# Altium PCB NG6011.PcbDoc
Units mm, origin at the board's own origin, x right, y up, seen from the top; angles counter-clockwise.
Board outline 26 x 11.5 mm, 4 copper layers (Top Layer, Internal Layer 1, Internal Layer 2, Bottom Layer), stack 0.772 mm thick; 15 components, 10 nets, 53 pads, 67 vias.
Unrouted connection lines stored in the file: 4.
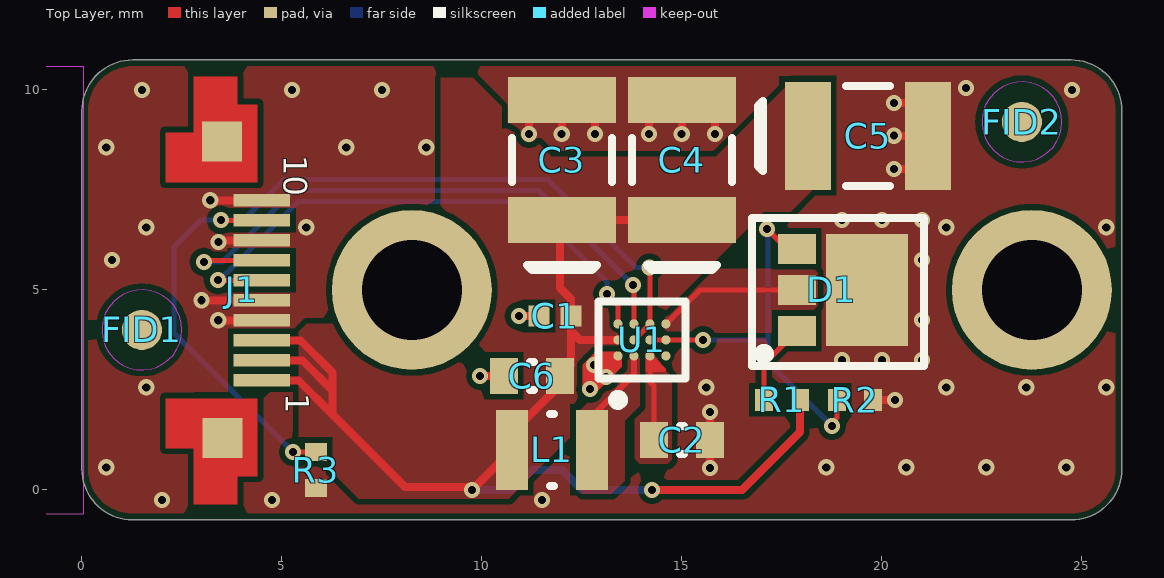
[diagram p0: Top Layer view]
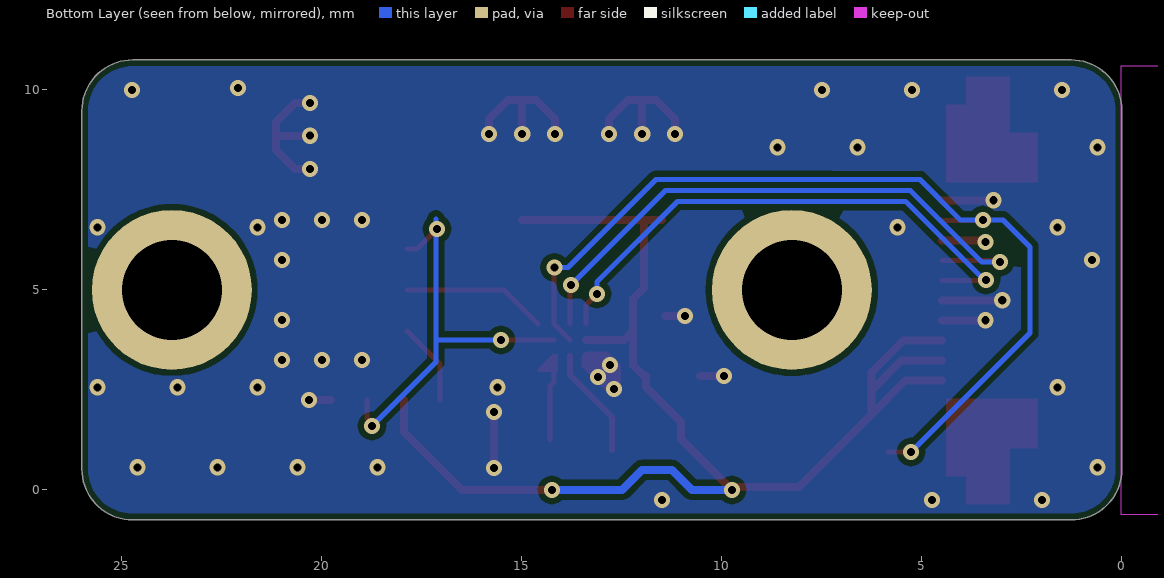
[diagram p1: Bottom Layer view, seen from below]
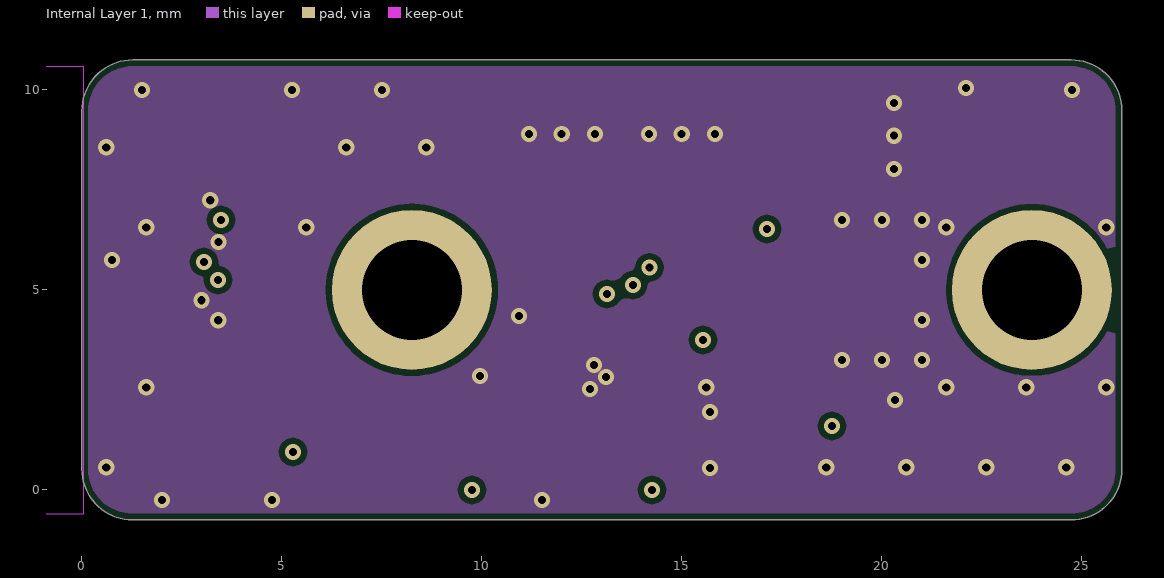
[diagram p2: Internal Layer 1]
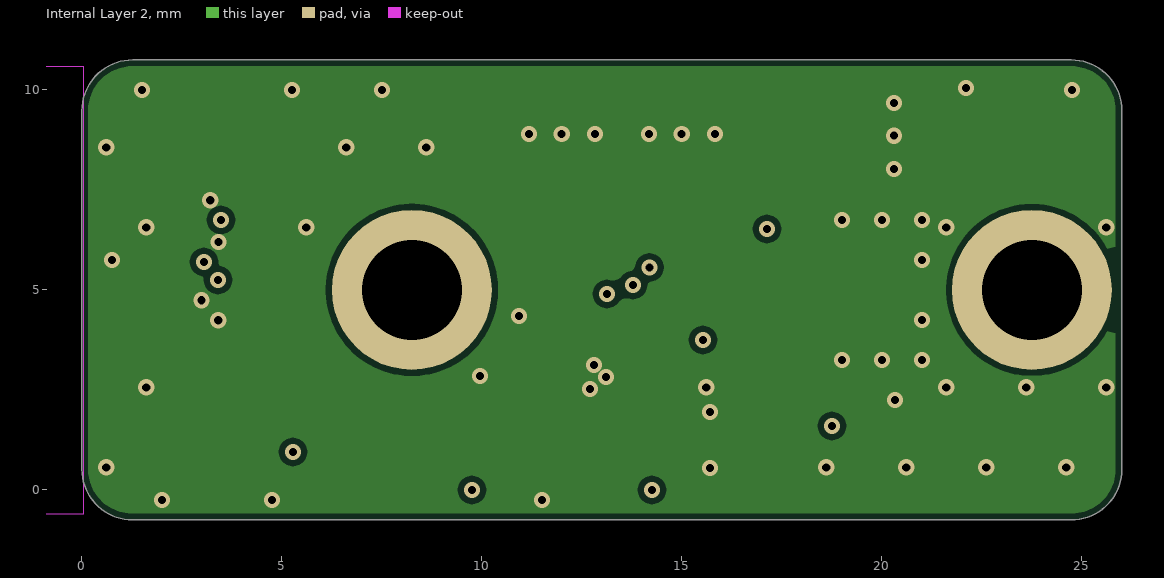
[diagram p3: Internal Layer 2]

## Layer stack, top to bottom
Top Solder Mask: solder mask 0.0178, Solder Resist, Dk 3.5
Top Layer: signal copper 0.0356
Dielectric 1: prepreg 0.0711, PP-006, Dk 4
Internal Layer 1: signal copper 0.0279
Dielectric 2: core 0.51, Core-038, Dk 4.3
Internal Layer 2: signal copper 0.0203
Dielectric 3: prepreg 0.0711, PP-006, Dk 4
Bottom Layer: signal copper 0.0356
Bottom Solder Mask: solder mask 0.0178, Solder Resist, Dk 3.5

## Board outline
0,0.52 ccw(c1.27,0.52) 1.27,-0.75 24.73,-0.75 ccw(c24.73,0.52) 26,0.52 26,9.48 ccw(c24.73,9.48) 24.73,10.75 1.27,10.75 ccw(c1.27,9.48) 0,9.48

## Design rules (kind name [scope] priority, off if disabled: settings)
AcuteAngle [All] p1: minimum=1.50000000000000E+0001 checktracksonly=TRUE
AssemblyTestPointUsage [All] p1: valid=2
BoardOutlineClearance [not InNet('GND')] p1: gap=0.2 ignorepadtopadclearanceinfootprint=FALSE
BoardOutlineClearance BoardOutlineClearance_GND [All] p2: gap=0.15 ignorepadtopadclearanceinfootprint=FALSE
Clearance Clearance_foot [HasFootprint('LM3644YFFR')] p1: gap=0.1 ignorepadtopadclearanceinfootprint=FALSE
Clearance [All] p2: gap=0.15 ignorepadtopadclearanceinfootprint=FALSE
ComponentClearance "BGA Decoupling Clearance" [IsComponent AND OnBottomLayer AND WithinRoom('BGA Decoupling') vs IsComponent AND OnBottomLayer AND WithinRoom('BGA Decoupling')] p1: gap=0 collisioncheckmode=3 verticalgap=0 showdistances=FALSE
ComponentClearance [All] p2: gap=0 collisioncheckmode=3 verticalgap=0 showdistances=TRUE
ComponentOrientations [All] p1: allowedrotations=32
FabricationTestPointUsage [All] p1: valid=2 allowmultiple=FALSE
HoleSize [All] p1: absolutevalues=TRUE maxlimit=25.4 minlimit=0.102 maxpercent=80.000 minpercent=20.000
HoleToHoleClearance [All] p1: gap=0.076 allowstackedmicrovias=TRUE
MinimumAnnularRing [All] p1: minimumring=0.076
MinimumSolderMaskSliver [All] p1: minsoldermaskwidth=0.01
NetAntennae [All] p1: netantennaetolerance=0.025
PlaneConnect [All] p1: pad.planeconnectstyle=Relief pad.reliefexpansion=0.508 pad.reliefentries=4 pad.reliefconductorwidth=0.254 pad.reliefairgap=0.254 via.planeconnectstyle=Direct via.reliefexpansion=0.508 via.reliefentries=4 via.reliefconductorwidth=0.254 via.reliefairgap=0.254
PolygonConnect [All] p1: connectstyle=Direct reliefconductorwidth=0.254 reliefentries=4 polygonreliefangle="90 Angle" airgapwidth=0.254
RoutingPriority [InNet('No Net')] p1: routingpriority=0
RoutingVias [All] p1: holewidth=0.203 width=0.406 viastyle="Through Hole" minholewidth=0.203 minwidth=0.406 maxholewidth=0.203 maxwidth=0.406
SMDToCorner [All] p1: distance=0
SMDToPlane [All] p1: distance=0
SilkToSilkClearance [All] p1: silktosilkclearance=-0.254
SilkToSolderMaskClearance [IsPad] p1: minsilkscreentomaskgap=-5 clearancetoexposedcopper=TRUE
SolderMaskExpansion SolderMaskExpansion_Via [IsVia] p1: expansion=-10 istentingtop=TRUE
SolderMaskExpansion [All] p2: expansion=0.051 istentingtop=FALSE
UnRoutedNet [All] p1: checkbadconnections=TRUE
Width [All] p1: maxlimit=0.5 minlimit=0.125 preferedwidth=0.2
18 further rules are at their usual default settings.

## Classes and differential pairs
component class NG6011_IR_Dot_Projector: C1 C2 C3 C4 C5 C6 D1 J1 L1 R1 R2 R3 U1
component class TopLevel: FID1 FID2

## Components (designator, comment, footprint, x,y, rotation, side; value= is the part's Value field where it differs from the comment)
C1 "10uF 0402" CAPC0402(1005)70_L 11.825,4.35 r0 top
C2 "10uF 0603" CAPC0603(1608)100_L 15,1.25 r0 top
C3 "150uF 1206 10V tantal" RESTL1210(3225)_N 12,8.25 r90 top
C4 "150uF 1206 10V tantal" RESTL1210(3225)_N 15,8.25 r90 top
C5 "150uF 1206 10V tantal" RESTL1210(3225)_N 19.65,8.85 r0 top
C6 "10uF 0603" CAPC0603(1608)100_L 11.25,2.85 r0 top
D1 "BELAGO1.1" Belago1.1 19.25,5 r180 top
FID1 "FIDUCIAL_ROUND_1MM" FIDUCIAL_ROUND_1MM 1.5,4 r90 top
FID2 "FIDUCIAL_ROUND_1MM" FIDUCIAL_ROUND_1MM 23.5,9.2 r90 top
J1 "SFV10R-2STE1HLF Top Contact" SFV10R-2STE1HLF 4,5 r90 top
L1 "1uH, 3.2A, 20%" DFE252012P-1R0M=P2 11.75,1 r0 top
R1 "300K 0402" RESC0402(1005)_L 17.5,2.25 r0 top
R2 "360K 0402" RESC0402(1005)_L 19.325,2.25 r180 top
R3 "10K 0402" RESC0402(1005)_L 5.85,0.5 r90 top
U1 "LM3644YFFR" LM3644YFFR 14,3.75 r90 top

## Footprints (in the part's own frame and the unit in brackets; to place one, negate y for a bottom-side part, rotate by r counter-clockwise, add the part's x,y. Pads: shape width x height; smd on the part's side, far side on the other; paste and mask are expansions set on the pad)
Belago1.1 [mm] "SOT23, 6-Leads, Body 2x1.25mm, Pitch 0.65mm"
  rect 0.95x0.75 smd: 1(1.375,1.025) 2(1.375,0) 3(1.375,-1.025)
  rect 2.05x2.8 smd: 4(-0.375,0)
  silkscreen extent -1.8,-1.8 2.5,1.9, body extent -1.8,-1.8 2.4,1.8, height 3.25
CAPC0402(1005)70_L [mm] "Chip Capacitor, Body 1.0x0.5mm, Height 0.7mm, IPC High Density"
  rect 0.52x0.52 smd: 1(-0.4,0) 2(0.4,0)
  body extent -0.55,-0.3 0.55,0.3, height 0.7
CAPC0603(1608)100_L [mm] "Chip Capacitor, Body 1.6x0.8mm, Height 1.0mm, IPC High Density"
  rect 0.7x0.9 smd: 1(-0.7,0) 2(0.7,0)
  silkscreen extent -0.05,-0.35 0.05,0.35, body extent -0.87,-0.47 0.88,0.48, height 1
DFE252012P-1R0M=P2 [mm] "Chip Inductor, 2-Leads, Body 2.40x2.00mm, IPC High Density"
  rect 0.8x2 smd: 1(-1,0) 2(1,0)
  silkscreen extent -0.05,-0.9 0.05,0.9, body extent -1.25,-1.1 1.25,1.1, height 1.2
FIDUCIAL_ROUND_1MM [mm] "Round, 1mm dia"
  round 1 smd paste-1 mask+0.5: 1(0,0)
  Top Layer keep-out circle w0.025: c0,0 r1
LM3644YFFR [mm] "DSBGA 12 (pitch 0.4mm)"
  round 0.23 smd paste-1000 mask-1000: A1(-0.4,0.6) A2(0,0.6) A3(0.4,0.6) B1(-0.4,0.2) B2(0,0.2) B3(0.4,0.2) C1(-0.4,-0.2) C2(0,-0.2) C3(0.4,-0.2) D1(-0.4,-0.6) D2(0,-0.6) D3(0.4,-0.6)
  silkscreen extent -1.62,-1.09 0.96,1.09, body extent -1.21,-1.34 1.21,1.34, height 0.25
RESC0402(1005)_L [mm] "Chip Resistor, Body 1.0x0.5mm, IPC High Density"
  rect 0.45x0.55 smd: 1(-0.45,0) 2(0.45,0)
  body extent -0.52,-0.27 0.53,0.28, height 0.4
RESTL1210(3225)_N [mm] "Chip Resistor, Body 3.2x2.5mm, IPC Medium Density"
  rect 1.15x2.7 smd: 1(-1.5,0) 2(1.5,0)
  silkscreen extent -2.75,-1.25 0.55,1.25, body extent -1.7,-1.35 1.7,1.35, height 0.71
SFV10R-2STE1HLF [mm] "CONN FFC TOP 10POS 0.50MM R/A"
  rect 0.305x1.405 smd: 1(-2.258,-0.494) 1(-2.258,-0.494) 2(-1.759,-0.494) 3(-1.258,-0.494) 4(-0.758,-0.494) 5(-0.258,-0.494) 6(0.242,-0.494) 7(0.741,-0.494) 8(1.242,-0.494) 9(1.742,-0.494) 10(2.242,-0.494)
  rect 1x1 smd: 11(-3.707,0.486) 12(3.708,0.494)
  Top Layer region: -3.959,-0.395 -2.709,-0.395 -2.709,1.905 -3.959,1.905
  Top Layer region: -5.358,0.105 -2.708,0.105 -2.708,1.205 -5.358,1.205
  Top Layer region: -4.658,-0.395 -2.708,-0.395 -2.708,1.205 -4.658,1.205
  Top Layer region: 4.642,1.205 2.692,1.205 2.692,-0.395 4.642,-0.395
  Top Layer region: 5.342,1.205 2.692,1.205 2.692,0.105 5.342,0.105
  Top Layer region: 3.942,1.905 2.692,1.905 2.692,-0.395 3.942,-0.395
  Keep-Out Layer region: 5.594,5.708 5.594,3.973 -5.611,3.973 -5.611,5.708
  body extent -5.26,-0.89 5.24,4.01, height 1.82

## Part data
C1: library part GRM155R60J106ME15D, "CAP CER 10UF 6.3V X5R 0402 20%", Capacitance=10uF, Case Code (Imperial)=0402, Case Code (Metric)=1005, Dielectric=X5R, Manufacturer 1=Murata, Max Operating Temperature=85°C, Min Operating Temperature=-55°C, Supplier Part Number 1=490-13238-1-ND, Tolerance=20%, Voltage Rating=6.3V, Case/Package=0402, ComponentLink1Description=https://www.murata.com/~/media/webrenewal/support/library/catalog/products/capacitor/mlcc/c02e.ashx?la=en-us&src-supplier=Digi-Key, ComponentLink1URL=https://www.murata.com/~/media/webrenewal/support/library/catalog/products/capacitor/mlcc/c02e.ashx?la=en-us&src-supplier=Digi-Key, Length=0.039inch, Manufacturer Part Number 1=GRM155R60J106ME15D, Mount="Surface Mount", Packaging="Tape and Reel", Pricing 1="1=0.23000, 10=0.15700, 100=0.07950, 500=0.05442, 1000=0.04814, 2500=0.04605, 5000=0.04186 (USD)", RoHS=Yes, Stock 1=1839627, Supplier 1=Digi-Key, Thickness=0.026inch, Voltage Rating (DC)=6.3V, Width=0.02inch
C2 C6: library part GRM188R61A106ME69D, "CAP CER 10UF 10V X5R 0603 20%", Capacitance=10uF, Case Code (Imperial)=0603, Case Code (Metric)=1608, Dielectric=X5R, Manufacturer 1=Murata, Max Operating Temperature=85°C, Min Operating Temperature=-55°C, Package Quantity=4000, Supplier Part Number 1=490-10475-1-ND, Tolerance=20%, Voltage Rating=10V, Case/Package=0603, ComponentLink1Description=http://www.mouser.com/ds/2/281/c02e-2905.pdf?src-supplier=Mouser, ComponentLink1URL=http://www.mouser.com/ds/2/281/c02e-2905.pdf?src-supplier=Mouser, ComponentLink2Description=http://components.arrow.com/part/dataview/0323_06119472?src-supplier=Arrow+Europe, ComponentLink2URL=http://components.arrow.com/part/dataview/0323_06119472?src-supplier=Arrow+Europe, ComponentLink3Description=http://www.farnell.com/datasheets/2048014.pdf?src-supplier=Farnell, ComponentLink3URL=http://www.farnell.com/datasheets/2048014.pdf?src-supplier=Farnell, ComponentLink4Description=http://www.farnell.com/datasheets/1872210.pdf?src-supplier=Farnell, ComponentLink4URL=http://www.farnell.com/datasheets/1872210.pdf?src-supplier=Farnell, ComponentLink5Description=http://search.murata.co.jp/Ceramy/image/img/A01X/G101/ENG/GRM188R61A106ME69-01.pdf?src-supplier=Digi-Key, ComponentLink5URL=http://search.murata.co.jp/Ceramy/image/img/A01X/G101/ENG/GRM188R61A106ME69-01.pdf?src-supplier=Digi-Key, ComponentLink6Description=http://www.farnell.com/datasheets/1872210.pdf?src-supplier=Newark, ComponentLink6URL=http://www.farnell.com/datasheets/1872210.pdf?src-supplier=Newark, ComponentLink7Description=http://www.farnell.com/datasheets/2048014.pdf?src-supplier=Element14, ComponentLink7URL=http://www.farnell.com/datasheets/2048014.pdf?src-supplier=Element14, ComponentLink8Description=http://www.farnell.com/datasheets/2048014.pdf?src-supplier=Newark, ComponentLink8URL=http://www.farnell.com/datasheets/2048014.pdf?src-supplier=Newark, Depth=0.8mm, Height=0.8mm, Lead Free="Lead Free", Length=1.6mm, Manufacturer Part Number 1=GRM188R61A106ME69D, Material=Ceramic, Mount="Surface Mount", Packaging="Tape and Reel", Pricing 1="1=0.21000, 10=0.14100, 100=0.07130, 500=0.04876, 1000=0.04313 (USD)", REACH SVHC=Unknown, RoHS=Yes, Stock 1=2873098, Supplier 1=Digi-Key, Termination=SMD/SMT, Thickness=0.035inch, Voltage Rating (DC)=10V, Weight=0.000222oz, Width=0.8mm
C3 C4 C5: library part TLJB157M010R0500, "Tantalum Capacitor, Polarized, Tantalum (dry/solid), 10V, 20% +Tol, 20% -Tol, 150uF, Surface Mount, 1210", Capacitance=150uF, Capacitor Type=Tantalum, ESR (Equivalent Series Resistance)=500mR, Leakage Current=15uA, Manufacturer 1="Kyocera AVX", Max Operating Temperature=125°C, Min Operating Temperature=-55°C, Negative Tolerance=20%, Package Shape=Rectangular, Package Style=SMTMeter, Rated DC Voltage (URdc)=10V, Ripple Current=371mA, Supplier Part Number 1=478-3349-1-ND, Category="Tantalum Capacitors", ComponentLink1Description=https://datasheet.ciiva.com:443/pdfs/VipMasterIC/IC/AVXC/AVXC-S-A0008508048/AVXC-S-A0008508048-1.pdf?src-supplier=IHS+Markit, ComponentLink1URL=https://datasheet.ciiva.com:443/pdfs/VipMasterIC/IC/AVXC/AVXC-S-A0008508048/AVXC-S-A0008508048-1.pdf?src-supplier=IHS+Markit, ComponentLink2Description=https://datasheet.ciiva.com/264/tlj-264786.pdf?src-supplier=Digi-Key, ComponentLink2URL=https://datasheet.ciiva.com/264/tlj-264786.pdf?src-supplier=Digi-Key, ComponentLink3Description=https://datasheet.ciiva.com/264/tlj-264787.pdf?src-supplier=Digi-Key, ComponentLink3URL=https://datasheet.ciiva.com/264/tlj-264787.pdf?src-supplier=Digi-Key, ComponentLink4Description=https://datasheet.ciiva.com/264/tlj-264788.pdf?src-supplier=Digi-Key, ComponentLink4URL=https://datasheet.ciiva.com/264/tlj-264788.pdf?src-supplier=Digi-Key, ComponentLink5Description=https://datasheet.ciiva.com/46385/1910903-46385237.pdf?src-supplier=Element14, ComponentLink5URL=https://datasheet.ciiva.com/46385/1910903-46385237.pdf?src-supplier=Element14, ComponentLink6Description=https://datasheet.ciiva.com/28515/tlj-28515528.pdf?src-supplier=Element14, ComponentLink6URL=https://datasheet.ciiva.com/28515/tlj-28515528.pdf?src-supplier=Element14, ComponentLink7Description=https://datasheet.ciiva.com/7773/1533257-7773833.pdf?src-supplier=Element14, ComponentLink7URL=https://datasheet.ciiva.com/7773/1533257-7773833.pdf?src-supplier=Element14, ComponentLink8Description=https://datasheet.ciiva.com/14593/70001364-14593673.pdf?src-supplier=Allied+Electronics, ComponentLink8URL=https://datasheet.ciiva.com/14593/70001364-14593673.pdf?src-supplier=Allied+Electronics, ComponentLink9Description=https://datasheet.ciiva.com/14606/70001364-14606409.pdf?src-supplier=Allied+Electronics, ComponentLink9URL=https://datasheet.ciiva.com/14606/70001364-14606409.pdf?src-supplier=Allied+Electronics, ComponentLink10Description=https://datasheet.ciiva.com/7773/1533257-7773834.pdf?src-supplier=Element14, ComponentLink10URL=https://datasheet.ciiva.com/7773/1533257-7773834.pdf?src-supplier=Element14, ComponentLink11Description=https://datasheet.ciiva.com/11229/tlj-11229389.pdf?src-supplier=Avnet, ComponentLink11URL=https://datasheet.ciiva.com/11229/tlj-11229389.pdf?src-supplier=Avnet, ComponentLink12Description=https://datasheet.ciiva.com/17339/tlj-17339422.pdf?src-supplier=Avnet+Europe, ComponentLink12URL=https://datasheet.ciiva.com/17339/tlj-17339422.pdf?src-supplier=Avnet+Europe, Dielectric Material=Tantalum, Height=1.9mm, JESD-609 Code=e3, Length=3.5mm, Manufacturer Part Number 1=TLJB157M010R0500, Mount="Surface Mount", Number of Pins=2, Packaging="Tape and Reel", Polarity=Polarized, Positive Tolerance=20%, Pricing 1="1=0,74000, 10=0,54700, 50=0,43800, 100=0,37540, 500=0,29716, 1000=0,25024 (USD)", REACH SVHC=Yes, RoHS=Yes, RoHS Compliant=Yes, Size Code=1411, Stock 1=10000, Supplier 1=Digi-Key, Terminal Finish=Nickel, Termination="J BEND", Width=2.8mm
D1: "Dot-Pattern Infrared Illuminator for 3D Stereoscopic / Imaging AQAA-20", Manufacturer 1=AMS, Manufacturer Part Number 1="Belago1.1 AQAA-20"
FID1 FID2: library part FIDUCIAL, "Fiducial with various available footprints"
J1: library part SFV10R-2STE1HLF, "CONN FFC TOP 10POS 0.50MM R/A", Contact Resistance=30mR, Current Rating=500mA, Flammability Rating="UL94 V-0", Housing Color=Black, Insulation Resistance=100MR, Manufacturer 1="Amphenol FCI", Max Operating Temperature=105°C, Max Voltage Rating (AC)=50V, Min Operating Temperature=-55°C, Package Quantity=1, Supplier Part Number 1=609-4306-1-ND, Actuator Material=Glass,Polyphenylene, ComponentLink1Description=https://datasheet.ciiva.com/672/10112793-672039.pdf?src-supplier=Digi-Key, ComponentLink1URL=https://datasheet.ciiva.com/672/10112793-672039.pdf?src-supplier=Digi-Key, ComponentLink2Description=https://datasheet.ciiva.com/672/10112793-672040.pdf?src-supplier=Digi-Key, ComponentLink2URL=https://datasheet.ciiva.com/672/10112793-672040.pdf?src-supplier=Digi-Key, ComponentLink3Description=https://datasheet.ciiva.com/672/10112793-672041.pdf?src-supplier=Digi-Key, ComponentLink3URL=https://datasheet.ciiva.com/672/10112793-672041.pdf?src-supplier=Digi-Key, ComponentLink4Description=https://datasheet.ciiva.com/10368/10112793-10368361.pdf?src-supplier=Avnet, ComponentLink4URL=https://datasheet.ciiva.com/10368/10112793-10368361.pdf?src-supplier=Avnet, Contact Location=Top, Contact Material=Bronze, Contact Plating=Tin, Depth=4.9mm, Gender=Female, Housing Material=Polyamide, Lead Free="Lead Free", Length=10.5mm, Manufacturer Part Number 1=SFV10R-2STE1HLF, Max Voltage Rating (DC)=50V, Mount="Surface Mount", Number of Contacts=10, Number of Positions=10, Number of Rows=1, Orientation="Right Angle", Packaging="Tape and Reel", Pitch=0.5mm, Pricing 1="1=0.63000, 10=0.59300, 25=0.53360, 50=0.47420, 100=0.45440, 250=0.41488, 500=0.39512, 1000=0.32597 (USD)", Radiation Hardening=No, RoHS=Yes, Stock 1=78727, Supplier 1=Digi-Key, Supplier 2=Mouser, Supplier Part Number 2=649-SFV10R-2STE1HLF, Termination=Solder, Voltage Rating=50V, Wire/Cable Type=Straight
L1: library part DFE252012P-1R0M=P2, "FIXED IND 1UH 3.2A 42 MOHM SMD", Case Code (Imperial)=1008, Case Code (Metric)=2520, Current Rating=4.3A, DC Resistance (DCR)=42mR, Inductance=1uH, Manufacturer=Murata, Manufacturer Part Number=DFE252012P-1R0M=P2, Max DC Current=3.2A, Max Operating Temperature=125°C, Min Operating Temperature=-40°C, Supplier Part Number 1=490-10647-1-ND, Test Frequency=1MHz, Tolerance=20%, Case/Package=1008, ComponentLink1Description=http://www.farnell.com/datasheets/2550134.pdf?src-supplier=Farnell, ComponentLink1URL=http://www.farnell.com/datasheets/2550134.pdf?src-supplier=Farnell, ComponentLink2Description=https://www.murata.com/~/media/webrenewal/products/inductor/chip/tokoproducts/wirewoundmetalalloychiptype/m_dfe252012p.ashx?src-supplier=Digi-Key, ComponentLink2URL=https://www.murata.com/~/media/webrenewal/products/inductor/chip/tokoproducts/wirewoundmetalalloychiptype/m_dfe252012p.ashx?src-supplier=Digi-Key, ComponentLink3Description=http://www.murata.com/~/media/webrenewal/products/inductor/chip/tokoproducts/wirewoundmetalalloychiptype/m_dfe252012p.ashx?src-supplier=Digi-Key, ComponentLink3URL=http://www.murata.com/~/media/webrenewal/products/inductor/chip/tokoproducts/wirewoundmetalalloychiptype/m_dfe252012p.ashx?src-supplier=Digi-Key, ComponentLink4Description=http://www.toko.co.jp/products/pdf/inductors/dfe252012p.pdf?src-supplier=Avnet, ComponentLink4URL=http://www.toko.co.jp/products/pdf/inductors/dfe252012p.pdf?src-supplier=Avnet, Composition=Wirewound, Core Material=Ferrite, Depth=2mm, Height - Seated (Max)=0.039inch, Length=0.098inch, Manufacturer 1=Murata, Manufacturer 2=Murata, Manufacturer 3=Murata, Manufacturer 4=Murata, Manufacturer Part Number 1=DFE252012P-1R0M=P2, Manufacturer Part Number 2=DFE252012P-1R0M=P2, Manufacturer Part Number 3=DFE252012P-1R0M=P2, Manufacturer Part Number 4=DFE252012P-1R0M=P2, Mount="Surface Mount", Packaging="Tape and Reel", Pricing 1="1=0.43000, 10=0.37800, 100=0.27030, 500=0.22702, 1000=0.18377 (USD)", Pricing 2="1=0.43000, 10=0.37800, 100=0.27030, 500=0.22702, 1000=0.18377 (USD)", Pricing 3="1=0.43000, 10=0.37900, 50=0.37900, 100=0.27000, 1000=0.18400, 10000=0.14600 (USD)", Pricing 4="1=0.64000, 10=0.56500, 100=0.40500, 500=0.34000, 1000=0.27500 (SGD)", RoHS=Yes, Shielding=Shielded, Stock 1=2560, Stock 2=95, Stock 3=667, Stock 4=41, Supplier 1=Digi-Key, Supplier 2=Digi-Key, Supplier 3=Mouser, Supplier 4=Element14, Supplier Part Number 2=490-10647-6-ND, Supplier Part Number 3=81-DFE252012P-1R0MP2, Supplier Part Number 4=2530071, Width=0.079inch
R1: library part RC0402FR-07300KL, "RES SMD 300K OHM 1% 1/16W 0402", Case Code (Imperial)=0402, Case Code (Metric)=1005, Manufacturer 1=Yageo, Max Operating Temperature=155°C, Min Operating Temperature=-55°C, Power Rating=63mW, Resistance=300kR, Supplier Part Number 1=311-300KLRCT-ND, Temperature Coefficient=100ppm/°C, Tolerance=1%, Voltage Rating=50V, Case/Package=0402, ComponentLink1Description=https://datasheet.ciiva.com/16771/pyu-rc0402-51-rohs-l-6-r-16771583.pdf?src-supplier=Future+Electronics, ComponentLink1URL=https://datasheet.ciiva.com/16771/pyu-rc0402-51-rohs-l-6-r-16771583.pdf?src-supplier=Future+Electronics, Composition="Thick Film", Depth=0.5mm, Height=0.35mm, Lead Free="Lead Free", Length=1mm, Manufacturer Part Number 1=RC0402FR-07300KL, Military Standard=Not, Packaging="Tape and Reel", Pricing 1="1=0.10000, 10=0.01600, 100=0.00640, 1000=0.00289, 2500=0.00251, 5000=0.00207 (USD)", REACH SVHC=Unknown, RoHS=Yes, Stock 1=860842, Supplier 1=Digi-Key, Supplier 2=Newark, Supplier 3=Mouser, Supplier Part Number 2=59M5009, Supplier Part Number 3=603-RC0402FR-07300KL, Termination=SMD/SMT, Voltage Rating (DC)=50V, Width=0.5mm
R2: library part RC0402FR-07360KL, "Fixed Resistor, Metal Glaze/thick Film, 0.0625W, 360000ohm, 50V, 1% +/-Tol, 100ppm/Cel, Surface Mount, 0402", Manufacturer 1=Yageo, Max Operating Temperature=155°C, Min Operating Temperature=-55°C, Package Height=0.35mm, Package Length=1mm, Package Shape=Rectangular, Package Style=SMTMeter, Package Width=0.5mm, Rated Power Dissipation (P)=62.5mW, Rated Temperature=70°C, Resistance=360kR, Resistor Type="FIXED RESISTOR", Supplier Part Number 1=311-360KLRCT-ND, Temperature Coefficient=100ppm/°C, Tolerance=1%, Working Voltage=50V, Additional Feature="LASER TRIMMABLE", Category="Chip SMD Resistors", ComponentLink1Description=https://datasheet.ciiva.com:443/pdfs/VipMasterIC/IC/YAGO/YAGO-S-A0008145938/YAGO-S-A0008145938-1.pdf?src-supplier=IHS+Markit, ComponentLink1URL=https://datasheet.ciiva.com:443/pdfs/VipMasterIC/IC/YAGO/YAGO-S-A0008145938/YAGO-S-A0008145938-1.pdf?src-supplier=IHS+Markit, ComponentLink2Description=https://datasheet.ciiva.com/2453/pyu-r-int-thick-7-2453619.pdf?src-supplier=Digi-Key, ComponentLink2URL=https://datasheet.ciiva.com/2453/pyu-r-int-thick-7-2453619.pdf?src-supplier=Digi-Key, ComponentLink3Description=https://datasheet.ciiva.com/2453/pyu-r-int-thick-7-2453620.pdf?src-supplier=Digi-Key, ComponentLink3URL=https://datasheet.ciiva.com/2453/pyu-r-int-thick-7-2453620.pdf?src-supplier=Digi-Key, ComponentLink4Description=https://datasheet.ciiva.com/2453/pyu-r-int-thick-7-2453621.pdf?src-supplier=Digi-Key, ComponentLink4URL=https://datasheet.ciiva.com/2453/pyu-r-int-thick-7-2453621.pdf?src-supplier=Digi-Key, ComponentLink5Description=https://datasheet.ciiva.com/16742/pyu-rc0402-51-rohs-l-6-r-16742217.pdf?src-supplier=Future+Electronics, ComponentLink5URL=https://datasheet.ciiva.com/16742/pyu-rc0402-51-rohs-l-6-r-16742217.pdf?src-supplier=Future+Electronics, ComponentLink6Description=https://datasheet.ciiva.com/8886/pyu-rc0402-51-rohs-l-6-8886029.pdf?src-supplier=Avnet, ComponentLink6URL=https://datasheet.ciiva.com/8886/pyu-rc0402-51-rohs-l-6-8886029.pdf?src-supplier=Avnet, ComponentLink7Description=https://datasheet.ciiva.com/12561/pyu-rc0402-51-rohs-l-6-r-8721-12561150.pdf?src-supplier=Mouser, ComponentLink7URL=https://datasheet.ciiva.com/12561/pyu-rc0402-51-rohs-l-6-r-8721-12561150.pdf?src-supplier=Mouser, Construction=Chip, JESD-609 Code=e3, Manufacturer Part Number 1=RC0402FR-07360KL, Mount="Surface Mount", Number of Pins=2, Packaging="Tape and Reel", Pricing 1="1=0,10000, 10=0,01600, 100=0,00660, 1000=0,00299, 2500=0,00259, 5000=0,00214 (USD)", REACH SVHC=Yes, RoHS=Yes, RoHS Compliant=Yes, Size Code=0402, Stock 1=68700, Supplier 1=Digi-Key, Technology="METAL GLAZE/THICK FILM", Terminal Finish=Nickel, Termination=Wraparound
R3: library part RC0402FR-1310KL, "RES SMD 10K OHM 1% 0402 1/16W Chip Resistor, 0402 [1005 Metric], 10 kohm, RC Series, 50 V, Thick Film, 62.5 mW", Case Code (Imperial)=0402, Case Code (Metric)=1005, Manufacturer 1=Yageo, Max Operating Temperature=155°C, Min Operating Temperature=-55°C, Power Rating=62.5mW, Resistance=10kR, Supplier Part Number 1=67R9960, Temperature Coefficient=100ppm/°C, Tolerance=1%, Voltage Rating=50V, Case/Package=0402, ComponentLink1Description=https://datasheet.ciiva.com/16940/pyu-rc0402-51-rohs-l-6-16940293.pdf?src-supplier=Avnet+Europe, ComponentLink1URL=https://datasheet.ciiva.com/16940/pyu-rc0402-51-rohs-l-6-16940293.pdf?src-supplier=Avnet+Europe, ComponentLink2Description=https://datasheet.ciiva.com/28386/pyu-rc0402-51-rohs-l-6-28386855.pdf?src-supplier=Avnet+Europe, ComponentLink2URL=https://datasheet.ciiva.com/28386/pyu-rc0402-51-rohs-l-6-28386855.pdf?src-supplier=Avnet+Europe, ComponentLink3Description=https://datasheet.ciiva.com/16740/pyu-rc0402-51-rohs-l-6-r-16740602.pdf?src-supplier=Future+Electronics, ComponentLink3URL=https://datasheet.ciiva.com/16740/pyu-rc0402-51-rohs-l-6-r-16740602.pdf?src-supplier=Future+Electronics, ComponentLink4Description=https://datasheet.ciiva.com/8891/pyu-rc0402-51-rohs-l-6-8891339.pdf?src-supplier=Avnet, ComponentLink4URL=https://datasheet.ciiva.com/8891/pyu-rc0402-51-rohs-l-6-8891339.pdf?src-supplier=Avnet, ComponentLink5Description=https://datasheet.ciiva.com/5557/pyu-rc0402-51-rohs-l-6-r-5557997.pdf?src-supplier=Mouser, ComponentLink5URL=https://datasheet.ciiva.com/5557/pyu-rc0402-51-rohs-l-6-r-5557997.pdf?src-supplier=Mouser, ComponentLink6Description=https://datasheet.ciiva.com/7983/1018594-7983533.pdf?src-supplier=Element14, ComponentLink6URL=https://datasheet.ciiva.com/7983/1018594-7983533.pdf?src-supplier=Element14, Composition="Thick Film", Contact Plating=Tin,Matte,Lead, Depth=0.5mm, Lead Free="Lead Free", Length=1mm, Manufacturer Part Number 1=RC0402FR-1310KL, Military Standard=Not, Number of Pins=2, Number of Terminations=2, Packaging="Tape and Reel", Pricing 1="1=0.10000, 25=0.01200, 100=0.00400, 250=0.00400, 500=0.00300, 1000=0.00300 (USD)", Radiation Hardening=No, REACH SVHC="No SVHC", RoHS=Yes, Stock 1=62239, Supplier 1=Newark, Supplier 2="Future Electronics", Supplier 3=Mouser, Supplier 4=Element14, Supplier Part Number 2=RC0402FR-1310KL-CUTT, Supplier Part Number 3=603-RC0402FR-1310KL, Supplier Part Number 4=1799235, Termination=SMD/SMT, Voltage Rating (DC)=50V, Working Voltage=50V
U1: library part LM3644, "LED Driver, 2-Segment, PBGA12", Manufacturer 1="Texas Instruments", Max Operating Temperature=85°C, Max Supply Voltage=5.5V, Min Operating Temperature=-40°C, Min Supply Voltage=2.5V, Package Body Material=Plastic, Package Code=VFBGA, Package Shape=Rectangular, Package Style="GRID ARRAY, VERY THIN PROFILE, FINE PITCHMeter", Peak Reflow Temperature (Cel)=260°C, Supply Voltage-Nom=3.6V, Temperature Grade=INDUSTRIAL, Category="LED Drivers", ComponentLink1Description=https://www.ti.com:443/lit/ds/symlink/lm3644.pdf?src-supplier=IHS+Markit, ComponentLink1URL=https://www.ti.com:443/lit/ds/symlink/lm3644.pdf?src-supplier=IHS+Markit, ComponentLink2Description=https://datasheet.ciiva.com/48475/lm3644-48475318.pdf?src-supplier=Avnet, ComponentLink2URL=https://datasheet.ciiva.com/48475/lm3644-48475318.pdf?src-supplier=Avnet, Data Input Mode=SERIAL, Height - Seated (Max)=0.625mm, Interface IC Type="LED DISPLAY DRIVER", JESD-609 Code=e1, Length=1.66mm, Manufacturer Part Number 1=LM3644YFFR, Moisture Sensitivity Level=1, Multiplexed Display Capability=No, Number of Functions=1, Number of Pins=12, Number of Segments=2, Pricing 1="1=0,64580, 10=0,63600, 25=0,62590, 100=0,61590, 250=0,60610, 500=0,59600, 1000=0,58600, 3000=0,35000, 30000=0,34520, 300000=0,31610, 1500000=0,29870, 3000000=0,29850 (USD)", REACH SVHC=Yes, RoHS=Yes, RoHS Compliant=Yes, Stock 1=2033, Supplier 1="Arrow Electronics", Supplier Part Number 1=LM3644YFFR, Surface Mount=Yes, Terminal Finish=Copper, Terminal Form=Ball, Terminal Pitch=0.4mm, Terminal Position=BOTTOM, Width=1.28mm

## Free pads (board coordinates)
  round 4 hole 2.5 paste-10 mask+0.05: 5(23.75,5) 6(8.25,5)

## Via types
v1: diameter 0.406, hole 0.203, Top Layer to Bottom Layer, tented both sides, 67 vias

## Nets (pads, with @x,y where several pads share a name; then routed paths per layer and width w, separated by ;. In a path a pad name is that pad's centre, name@x,y a point inside that pad or via, vN(x,y) a via of type N, cw(c..) or ccw(c..) an arc to the next point about the centre after c; other vN are vias at no path point)
5V: C1.2 C3.1 C4.1 C5.1 C6.2 J1.1 J1.2 J1.3 L1.1 R1.2 U1.A2 | length 34.2
  Top Layer w0.2: J1.1@4.494,2.742 5.408,2.742 6.262,1.887 ; J1.2 5.509,3.241 6.262,2.488 ; J1.3 5.458,3.742 6.262,2.937 6.262,2.488 ; v1@9.75,0.075 8.075,0.075 6.262,1.887 ; v1@9.825,0.075 L1.1 11.025,1.275 11.025,1.7 11.9,2.575 C6.2@11.9,2.85 ; C3.1@11.5,6.75 C3.1 ; C6.2 12.225,3.125 12.225,3.975 ; U1.A2 12.45,3.75 12.225,3.975 ; v1(14.25,0) 16.5,0 17.95,1.45 R1.2 ; C4.1 C3.1 ; 6.262,1.887 6.262,2.488 ; C3.1 11.95,6.7 11.95,5.05 12.225,4.775 C1.2 12.225,3.975
  Bottom Layer w0.2: v1(9.75,0) 10.75,0 11.25,0.5 12,0.5 12.5,0 v1(14.25,0)
GND: C1.1 C2.2 C3.2 C4.2 C5.2 C6.1 D1.4 J1.4 J1.5 J1.8 J1.10 R2.1 R3.1 U1.A1 | length 21.3
  Top Layer w0.2: v1(2.992,4.742) J1.5 ; v1(3.209,7.242) J1.10 ; v1(3.408,4.242) J1.4 ; v1@3.411,6.214 v1(3.411,6.198) 3.451,6.237 3.597,6.237 3.601,6.242 J1.8 ; v1(9.95,2.85) C6.1 ; v1(10.925,4.35) C1.1 ; v1(11.175,8.9) 11.175,9.275 11.65,9.75 C3.2 ; v1@12.006,8.894 12.006,8.9 12,8.906 C3.2 ; v1(12.7,2.525) 12.72,2.525 12.981,2.786 13.005,2.786 13.05,2.831 13.05,2.875 13.094,2.875 13.203,2.984 13.203,3.028 13.4,3.225 U1.A1 13.025,3.35 v1(12.8,3.125) ; v1(12.825,8.9) 12.825,9.275 12.35,9.75 C3.2 ; v1(13.1,2.825) 13.4,3.125 ; v1(14.175,8.9) 14.175,9.275 14.65,9.75 C4.2 ; v1@15.006,8.894 15.006,8.9 15,8.906 C4.2 ; v1(15.7,0.55) C2.2 v1(15.7,1.95) ; v1(15.825,8.9) 15.825,9.275 15.35,9.75 C4.2 ; R2.1 v1(20.325,2.25) ; v1@20.294,8.844 20.3,8.844 20.306,8.85 C5.2 ; v1(20.3,8.025) 20.675,8.025 21.15,8.5 C5.2 ; v1(20.3,9.675) 20.675,9.675 21.15,9.2 C5.2
  other v1: 2,-0.25 4.75,-0.25 11.5,-0.25 0.608,0.565 18.608,0.565 20.608,0.565 22.608,0.565 24.608,0.565 1.608,2.565 15.608,2.565 21.608,2.565 23.608,2.565 25.608,2.565 19,3.25 20,3.25 21,3.25 21,4.25 0.75,5.75 21,5.75 1.608,6.565 5.608,6.565 21.608,6.565 25.608,6.565 19,6.75 20,6.75 21,6.75 0.608,8.565 6.608,8.565 8.608,8.565 20.3,8.856 11.994,8.9 14.994,8.9 1.5,10 5.25,10 7.5,10 24.75,10 22.1,10.05
HWEN: D1.3 R2.2 U1.C2 U1.D2 | length 10.4
  Top Layer w0.125: U1.C2 U1.D2 v1(15.525,3.75) ; v1(17.125,6.525) 17.625,6.025 D1.3 ; v1(18.75,1.6) 18.75,1.676 18.875,1.801 R2.2
  Bottom Layer w0.125: v1(15.525,3.75) 17.15,3.75 ; 17.15,6.775 17.15,3.75 ; v1(18.75,1.6) 17.15,3.2 17.15,3.75
I2C_SCL: J1.7 U1.B3 | length 14.9
  Top Layer w0.125: v1(3.05,5.7) 3.092,5.741 J1.7 ; v1(13.775,5.125) 13.8,5.1 U1.B3
  Bottom Layer w0.125: v1(3.05,5.7) 3.506,5.7 5.291,7.484 7.386,7.484 7.389,7.488 11.412,7.488 v1(13.775,5.125)
I2C_SDA: J1.6 U1.A3 | length 13.6
  Top Layer w0.125: v1(3.4,5.25) 3.408,5.242 J1.6 ; v1(13.125,4.9) 13.4,4.625 U1.A3
  Bottom Layer w0.125: v1(3.4,5.25) 3.439,5.25 3.614,5.425 3.62,5.425 5.405,7.209 7.5,7.209 7.503,7.213 11.112,7.213 13.124,5.201 v1(13.125,4.9) v1(13.125,4.9)
LED: D1.2 U1.D3 | length 3.6
  Top Layer w0.125: U1.D3 15.45,5 D1.2
NetC2_1: C2.1 U1.C1 | length 2.1
  Top Layer w0.125: U1.C1 14.2,2.7 14.3,2.6 C2.1
NetD1_1: D1.1 R1.1 | length 2.1
  Top Layer w0.125: R1.1 17.05,3.15 D1.1
NetL1_2: L1.2 U1.B1 | length 2.8
  Top Layer w0.15: L1.2 12.75,1.825 13.8,2.875 U1.B1
STRBL: J1.9 R3.2 U1.B2 U1.C3 | length 23.4
  Top Layer w0.125: v1(3.475,6.75) 3.484,6.742 J1.9 ; v1(5.275,0.95) R3.2 ; U1.B2 U1.C3 14.2,5.55 v1(14.188,5.562)
  Bottom Layer w0.125: v1(5.275,0.95) 2.3,3.925 2.3,6.075 2.975,6.75 v1(3.475,6.75) 4.04,6.75 5.05,7.759 7.272,7.759 7.275,7.763 11.65,7.763 13.85,5.562 v1(14.188,5.562)
pads on no net: FID1.1 FID2.1 J1.11 J1.12 U1.D1

## Polygon pours and split planes (outlines as drawn)
GND on Top Layer "GND_L01_P014" (solid, remove dead copper, pour order 14): 0,-0.75 0,10.75 26,10.75 26,-0.75
5V on Top Layer "5V_L01_P011" (solid, remove dead copper, pour order 11): 15.837,8.313 16.725,9.2 17.725,10.2 18.3,9.625 18.3,7.525 17.725,6.95 16.6,6.95
5V on Top Layer "5V_L01_P007" (solid, remove dead copper, pour order 7): 5.425,1.275 6.925,-0.225 10.675,-0.225 13.525,2.625 13.525,3.425 17.375,7.275 17.375,8.2 17.25,8.325 11.75,8.325 9.775,10.3 8.975,10.3 8.975,7.1 9.95,6.125 9.95,3.6 9.575,3.225 7.275,3.225 6.35,4.15 5.625,4.15 5.425,3.95
NetL1_2 on Top Layer "NETL1_2_L01_P008" (solid, remove dead copper, pour order 8): 13.875,3.425 13.95,3.35 13.95,2.1 13.575,1.725 13.575,0.225 13.25,-0.1 12.525,-0.1 12.4,0.025 12.4,1.925 13.575,3.1 13.575,3.275 13.725,3.425
LED on Top Layer "LED_L01_P010" (solid, remove dead copper, pour order 10): 14.525,4.075 14.675,3.925 17.725,3.925 18.4,4.6 18.4,5.425 18.3,5.525 15.075,5.525 14.525,4.975 14.525,4.225
NetC2_1 on Top Layer "NETC2_1_L01_P009" (solid, remove dead copper, pour order 9): 14.125,3.425 14.025,3.325 14.025,2 13.825,1.8 13.825,0.775 13.95,0.65 14.65,0.65 14.75,0.75 14.75,2.825 14.475,3.1 14.475,3.225 14.275,3.425
GND on Internal Layer 1 "GND_L02_P012" (solid, remove dead copper, pour order 12): 0,-0.75 0,10.75 26,10.75 26,-0.75
GND on Internal Layer 2 "GND_L03_P013" (solid, remove dead copper, pour order 13): 0,-0.75 0,10.75 26,10.75 26,-0.75
GND on Bottom Layer "GND_L04_P005" (solid, remove dead copper, pour order 5): 0,-0.75 0,10.75 26,10.75 26,-0.75

## Other copper
Top Layer:
  region net NetC2_1: 14.1,3.4 14.1,2.95 14.575,2.95 14.6,2.975 14.6,3.025 14.287,3.337
  region net GND: 13.375,3.45 12.85,3.45 12.525,3.125 12.525,2.45 12.625,2.35 12.8,2.35 12.8,2.375 13.5,3.075 13.5,3.325

## Silkscreen, mask and mechanical layers (free items; w line width, h text height)
Board:
  lines w0.1: 0,0.52 0,-0.75 1.27,-0.75 ; 24.73,10.75 26,10.75 26,9.48
  lines w0.2: 0,0.52 ccw(c1.27,0.52) 1.27,-0.75 24.73,-0.75 ccw(c24.73,0.52) 26,0.52 26,9.48 ccw(c24.73,9.48) 24.73,10.75 1.27,10.75 ccw(c1.27,9.48) 0,9.48 0,0.52

## Text inside footprints (layer, text, board x,y; h text height)
J1: Top Overlay "1" at 4.894,2.416 h1 r270; Top Overlay "10" at 4.844,8.366 h1 r270; Assembly Notes "Top contact ffc" at 0.292,2.244 h1 r270